# Altium PCB PCB2.PcbDoc (part 2 of 4)
Units mil, origin at the board's own origin, x right, y up, seen from the top; angles counter-clockwise.
Board outline 7874.02 x 7086.61 mil, 2 copper layers (Top Layer, Bottom Layer); 393 components, 284 nets, 1417 pads, 404 vias.
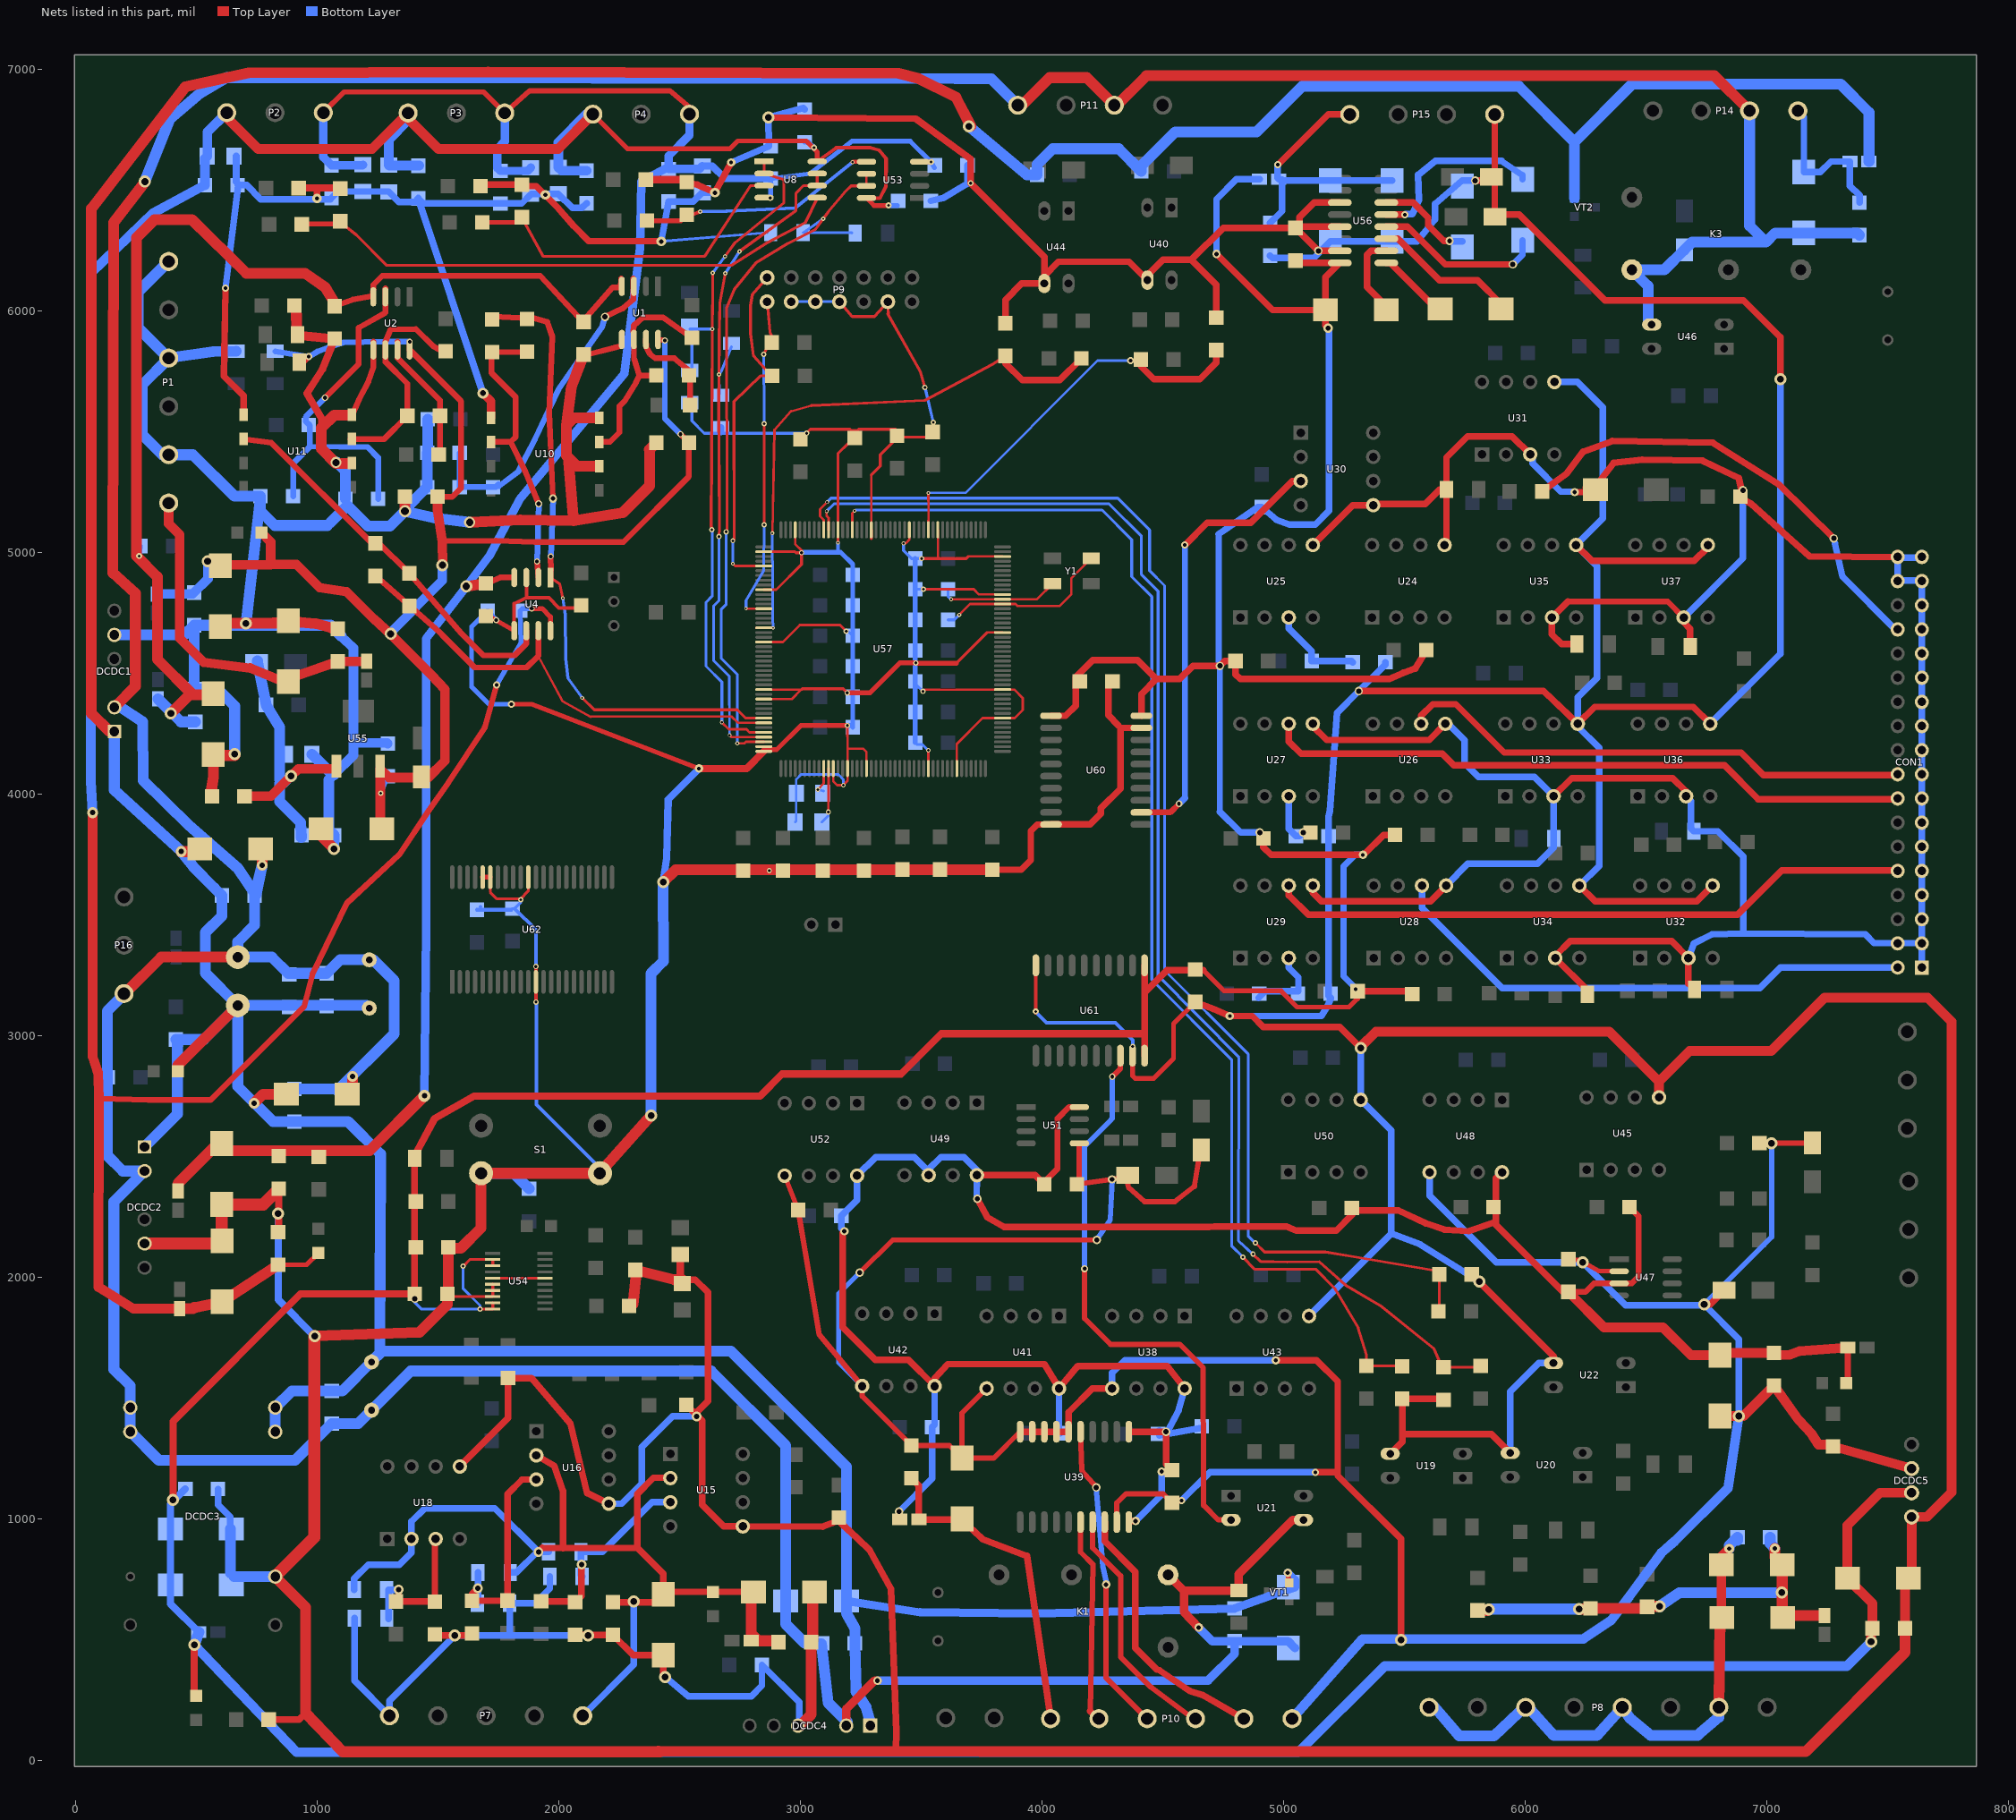
[diagram p2: the nets of this part, all layers, seen from the top]

## Via types
v1: diameter 22, hole 12, Top Layer to Bottom Layer, 63 vias
v2: diameter 19, hole 11, Top Layer to Bottom Layer, 42 vias
v3: diameter 50, hole 28, Top Layer to Bottom Layer, 34 vias
v4: diameter 15, hole 8, Top Layer to Bottom Layer, 27 vias
v5: diameter 35, hole 22, Top Layer to Bottom Layer, 25 vias
v6: diameter 16, hole 8, Top Layer to Bottom Layer, 23 vias
v7: diameter 30, hole 15, Top Layer to Bottom Layer, 22 vias
v8: diameter 22, hole 11, Top Layer to Bottom Layer, 14 vias
v9: diameter 17, hole 8, Top Layer to Bottom Layer, 13 vias
v10: diameter 35, hole 20, Top Layer to Bottom Layer, 12 vias
v11: diameter 16, hole 7, Top Layer to Bottom Layer, 10 vias
v12: diameter 18, hole 8, Top Layer to Bottom Layer, 9 vias
v13: diameter 25, hole 15, Top Layer to Bottom Layer, 8 vias
v14: diameter 40, hole 22, Top Layer to Bottom Layer, 8 vias
v15: diameter 45, hole 22, Top Layer to Bottom Layer, 7 vias
v16: diameter 25, hole 12, Top Layer to Bottom Layer, 6 vias
v17: diameter 15, hole 7, Top Layer to Bottom Layer, 6 vias
v18: diameter 15, hole 9, Top Layer to Bottom Layer, 6 vias
v19: diameter 35, hole 18, Top Layer to Bottom Layer, tented bottom, 6 vias
v20: diameter 27, hole 15, Top Layer to Bottom Layer, 5 vias
v21: diameter 40, hole 18, Top Layer to Bottom Layer, 4 vias
v22: diameter 50, hole 30, Top Layer to Bottom Layer, 4 vias
v23: diameter 14, hole 7, Top Layer to Bottom Layer, 4 vias
v24: diameter 157.48, hole 137.8, Top Layer to Bottom Layer, 4 vias
v25: diameter 35, hole 15, Top Layer to Bottom Layer, 4 vias
v26: diameter 35, hole 18, Top Layer to Bottom Layer, 3 vias
v27: diameter 25, hole 11, Top Layer to Bottom Layer, 3 vias
v28: diameter 17, hole 9, Top Layer to Bottom Layer, 3 vias
v29: diameter 22, hole 15, Top Layer to Bottom Layer, 3 vias
v30: diameter 30, hole 17, Top Layer to Bottom Layer, 2 vias
v31: diameter 20, hole 12, Top Layer to Bottom Layer, 2 vias
v32: diameter 28, hole 15, Top Layer to Bottom Layer, 2 vias
v33: diameter 45, hole 25, Top Layer to Bottom Layer, 2 vias
v34: diameter 40, hole 18, Top Layer to Bottom Layer, tented bottom, 2 vias
v35: diameter 47, hole 30, Top Layer to Bottom Layer, 1 vias
v36: diameter 30, hole 18, Top Layer to Bottom Layer, 1 vias
v37: diameter 27, hole 17, Top Layer to Bottom Layer, 1 vias
v38: diameter 12, hole 7, Top Layer to Bottom Layer, 1 vias
v39: diameter 18, hole 10, Top Layer to Bottom Layer, 1 vias
v40: diameter 45, hole 30, Top Layer to Bottom Layer, 1 vias
v41: diameter 18, hole 11, Top Layer to Bottom Layer, 1 vias
v42: diameter 26, hole 15, Top Layer to Bottom Layer, 1 vias
v43: diameter 18, hole 9, Top Layer to Bottom Layer, 1 vias
v44: diameter 50, hole 32, Top Layer to Bottom Layer, 1 vias
v45: diameter 24, hole 15, Top Layer to Bottom Layer, 1 vias
v46: diameter 50, hole 22, Top Layer to Bottom Layer, 1 vias
v47: diameter 20, hole 10, Top Layer to Bottom Layer, 1 vias
v48: diameter 17, hole 7, Top Layer to Bottom Layer, 1 vias
v49: diameter 34, hole 15, Top Layer to Bottom Layer, 1 vias
v50: diameter 35, hole 17, Top Layer to Bottom Layer, 1 vias

## Nets (pads, with @x,y where several pads share a name; then routed paths per layer and width w, separated by ;. In a path a pad name is that pad's centre, name@x,y a point inside that pad or via, vN(x,y) a via of type N, cw(c..) or ccw(c..) an arc to the next point about the centre after c; other vN are vias at no path point) (continued)
+5V_C: +5V.A C43.2 C95.1 C99.2 C106.2 C111.1 C122.1 C129.2 C142.2 C146.2 C159.1 C163.1 D33.2 DCDC5.2 L4.1 L12.2 R67.1 R68.1 R69.1 R71.1 R74.1 R75.1 R76.1 R123.2 U54.2 U54.3 U54.9 U54.10 U56.16 U60.1 U60.20 U61.1 U61.20 | length 24285.6
  Top Layer w11.81: v1(1604,2046.26) 1631.57,2073.83 U54.2@1726.73,2073.83 U54.3@1726.73,2048.24 ; v1(1673.84,1869.1) U54.10@1726.73,1869.1 U54.9@1726.73,1894.69
  Top Layer w20: 4668,3272 4754,3186 4990,3186 5057,3119 5272,3119 5307,3154 R75.1@5307,3185
  Top Layer w27: 4518,3272 4668,3272
  Top Layer w27.56: D33.2@1403.07,2504.07 D33.2@1403.07,2493.26 1403.07,1932.19 C111.1@1404,1931.26 v5(1404,1911.26) ; U60.1@4037.99,4325 4098,4325 4140,4367 4140,4485 4211,4556 4396,4556 4474,4478 4474,4477 ; U60.20@4412.01,4325 4412.01,4415.01 4474,4477 ; U61.20@4425,2917.99 4425,3179 ; U61.1@4425,3292.01 4425,3179 ; 4518,3272 4425,3179 ; v19(4723,6237) 4955,6005 C122.1@5174.02,6005 ; v5(4902,3842) R71.1@4917,3827 ; R71.1@4917,3817 4917,3782 4949,3750 v25@5317,3750 ; C129.2@5050,6210 5060,6200 U56.16@5233.54,6200 5174.02,6140.47 C122.1@5174.02,6005 ; v14(5185,5930) 5174.02,5940.98 C122.1@5174.02,6005 ; v7(5299,3193) R75.1@5307,3185 5499,3185 ; v25(5329,3749) 5332,3749 5415,3832 R69.1@5462,3832 ; R67.1@5592,4597 5546,4521 5497,4503 5437,4477 4822,4477 4802,4497 R68.1@4802,4552 4757,4552 v5(4737,4532) 4625,4532 4570,4477 4474,4477
  Top Layer w30: v3(403,1078) 403,1404 930.26,1931.26 C111.1@1404,1931.26 ; v3(491,479) 491,276 +5V.A@499,268 ; D33.2@1403.07,2504.07 1486,2658 1649,2750 2834,2751 2925,2842 3417,2842 3584,3009 4417,3009
  Top Layer w40: v3(7433,491) 7433,541 C43.2@7439,547 7439,650.02 C159.1@7335.02,754 7335.02,973.02 7470,1108 DCDC5.2@7601,1108
  Bottom Layer w11.81: v5(1404,1911.26) 1404,1895.26 1430.16,1869.1 v1(1673.84,1869.1) 1673.84,1883.42 1604,1953.26 v1(1604,2046.26)
  Bottom Layer w25: v5@4732,4532 4732,5077 ; 4737,3928 v5(4737,4532)
  Bottom Layer w27.56: v19@4723,6240 4723,6464 4806,6547 L4.1@4901.63,6547 ; 4732,5077 4895,5189 R76.1@4910,5189 4971,5137 5027,5116 5131,5116 5189,5174 5189,5926 v14(5185,5930) ; 4737,3928 4823,3842 v5(4902,3842) ; v7@5299,3197 5249,3247 5249,3701 5297,3749 v25(5329,3749)
  Bottom Layer w30: C99.2@454,1124 392.02,1062.02 C163.1@392.02,959 C95.1@392.02,727 392.02,648.61 L12.2@509.63,531
  Bottom Layer w40: v3(491,479) 915,34 5062,34 5419,391 7333,391 v3(7433,491)
  Bottom Layer w45: v3(491,479) L12.2@509.63,531
+5V_COM: +5V_COM.A C70.2 C75.2 C79.2 C164.1 C165.2 L2.1 L16.2 R92.2 R97.2 R99.2 R102.1 R105.1 R114.2 R117.1 R121.2 U38.8 U39.1 U39.20 U41.8 U42.8 U47.3 U48.8 U49.6 U49.8 U51.8 U52.8 | length 10652.1
  Top Layer w24: C79.2@4010,2385 4010,2395 4065,2450 4065,2658 4112,2705 U51.8@4155,2705 ; C75.2@6180,1940 6251,1940 6286,1975 U47.3@6390,1975 6442,1975 6470,2003 6470,2254 R105.1@6433,2291
  Top Layer w27.56: v10(3182,2191) 3176,2185 3176,1793 3310,1659 3447,1659 U42.8@3556,1550 3556,1582 3610,1641 4011,1641 U41.8@4071,1540 4149,1633 4519,1633 U38.8@4591,1540 ; v10(3409.01,1031.01) 3409.01,1000.62 L2.1@3411.63,998 ; U49.8@3731,2423 3972,2423 C79.2@4010,2385 ; v10(3733,2325) 3773,2250 3844,2209 4692,2209 4714,2211 5011,2211 5054,2193 5218,2193 R117.1@5285,2260 ; U39.20@4360,986.99 4364.01,991 v26(4388,991) ; U39.1@4360,1383 U39.1@4360,1361.01 v5(4513.99,1361.01) 4513.99,1227.01 C70.2@4539,1202 4533,1196 v26(4496,1196) ; R117.1@5285,2276 5297,2277 5476,2277 5589,2224 5666,2198 5766,2191 5880,2230 ; 5880,2228 5880,2230 ; U48.8@5905,2435 5880,2410 5880,2230 ; C75.2@6180,1940 6158,1940 5880,2218 5880,2230 ; C164.1@6807,1677.98 C164.1@6816.02,1687 ; C165.2@7031,1687 C165.2@7039,1679 ; +5V_COM.A@7331,1563 7336.63,1568.63 L16.2@7336.63,1709
  Top Layer w40: C75.2@6180,1940 6327,1793 6572,1793 6687.02,1677.98 C164.1@6807,1677.98 ; C164.1@6816.02,1687 C165.2@7031,1687 ; C165.2@7039,1679 7094,1679 7136,1695 L16.2@7336.63,1709
  Bottom Layer w27.56: v10(3182,2191) 3170,2203 R121.2@3170,2255 3235,2320 U52.8@3235,2421 3312,2498 3471,2498 3531,2438 U49.6@3531,2423 3531,2447 3582,2498 3677,2498 3731,2444 U49.8@3731,2423 v10@3730,2324 ; v10@3409.5,1031.5 3546,1168 R99.2@3546,1380 3556,1390 U42.8@3556,1550 ; U41.8@4071,1540 4071,1360 R97.2@4076,1355 ; v26@4388,992 4496,1100 v26(4496,1196) ; R92.2@4486,1366 4486,1345 4515.91,1350.44 R102.1@4662,1377 ; v5(4513.99,1361.01) 4520.01,1361.01 4566,1449 U38.8@4591,1540
+10V: C113.1 C115.2 L14.2 P1.1 | length 1401.2
  Top Layer w39.37: P1.1@385,5206 385,5120 430,5075 430,4646 530,4546 722,4523 853,4470 C115.2@1085,4550 L14.2@1186,4550
+12V_P: +12V_P.A C118.1 C120.2 C160.1 C161.2 D7.2 D9.2 D12.2 L15.2 P7.1 U15.2 U16.2 U18.2 | length 4210.6
  Top Layer w27.56: U16.2@1907,1263 1981,1219.52 2017,1116 2017,1011 2017,878 ; v14@1915,863 1932,880 2017,878 ; C161.2@2224,655 2399.02,655 C160.1@2432,687.98 ; U15.2@2453,1171 2391,1169 2325,1103 2325,880 ; C118.1@2806.02,698 2797,698 +12V_P.A@2638,698 2442.02,698 C160.1@2432,687.98 ; 2017,878 2325,880 ; 2325,880 2432,773 C160.1@2432,687.98
  Top Layer w45: C118.1@2802,705 2797,700 2797,698 2797,525 2827,495 2905,495 C120.2@2910,490
  Bottom Layer w27.56: D12.2@1153.07,707 1153.07,752.07 1211,810 1340,810 1390,860 U18.2@1390,917 1390,989 1445,1044 1735,1044 v14@1915,864 ; D9.2@1798.93,778 1825,778 1911,864 v14@1915,864 ; v14(1916,863) v14@1915,864 ; D7.2@1958.07,864 v14@1915,864 ; P7.1@2099,185 2311,397 v3(2311,659)
+15V_A: +15V_A.A C2.1 C15.1 C80.2 C82.1 C112.1 C114.2 D1.2 D3.2 D34.2 L7.2 U1.8 U2.8 U55.3 | length 6440.5
  Top Layer w24: D3.2@925.93,5789 942,5789 v7(965,5812) ; v45(1383,5874) 1383,5875 1383,5840 1596,5627 1596,5269 1559,5232 C15.1@1498,5232 ; 1517.15,5048 1740,5050 1900,5045 2268,5045 2539,5316 C2.1@2539,5456 v13(2504,5491) ; U1.8@2411,5883 v13(2439,5879)
  Top Layer w39.37: v3(546,4965) 579.98,4965 C82.1@599,4945.98 603,4949.98 807,4949.98 807,4952 ; +15V_A.A@769,5083 807,5045 807,4952 ; C112.1@1261,3865 1260.74,4005 1260.55,4105.83 1297.09,4069.29 1459.29,4069.29 1529,4139 1529,4433 1472,4495 1305,4662 1234,4726 1121,4839 1010,4856 914,4952 807,4952 ; v22(1304,4664) v22@1304,4671 ; C15.1@1498,5232 1498,5181 1517.15,5048 1520,4951 v22(1518,4949)
  Bottom Layer w20: v8(1262,4005) C114.2@1292,4075
  Bottom Layer w24: D1.2@826,5833.93 v7(965,5812) 1001,5833 1049,5851 1109,5870 1279,5875 v45(1383,5874) ; v13(2439,5879) 2439,5556 v13(2504,5491)
  Bottom Layer w39.37: L7.2@339,4829.37 484.37,4829.37 C80.2@490,4835 548,4893 v3@548,4964 ; v22(1304,4664) 1304,4671 1518,4885 v22(1518,4949)
+15V_C: +15V_C.A C3.1 C4.1 C6.2 C11.1 C12.2 C17.1 C18.2 C29.2 C41.2 C88.2 C90.1 L10.2 P2.1 P3.1 P4.1 U4.8 U8.8 U53.8 | length 13634.1
  Top Layer w15: U8.8@3070,6620 3149,6677 3289,6678 3326,6667 3355,6632 3354,6516 3329,6468 U53.8@3274,6469
  Top Layer w20: C88.2@838,2052 956,2052 +15V_C.A@1005,2101 ; v13(1888,4769) 1931,4769 1965.36,4734.64 U4.8@1965.36,4677.36 ; P4.1@2141,6816 2284,6673 2709,6673 2741,6705 3024,6705 3070,6659 U8.8@3070,6620 ; U53.8@3274,6469 3305,6438 v16(3365,6438)
  Top Layer w24: 96,2740 300,2734 558,2734 946,3122 981,3258 1122,3549 1340,3750 1460,3930 1541,4046 ; 1544,4050 1693,4276 ; 1694,4279 v7(1743,4453)
  Top Layer w40: v15(70,3924) 70,2914 93,2845 96,2740 94,1960 238.37,1870.63 L10.2@430,1870.63 ; P2.1@625.18,6822.18 625.18,6801.82 755,6672 1227,6672 P3.1@1376,6821 1376,6798 1502,6672 1997,6672 P4.1@2141,6816
  Top Layer w45: L10.2@430,1870.63 485.63,1870.63 490,1875 C90.1@606,1899.02 C88.2@838,2052
  Bottom Layer w20: v7(1743,4453) 1843,4626 C3.1@1840,4760 1849,4769 v13(1888,4769) ; C29.2@3018,6700 3034,6700 v16(3057,6677) ; v16(3365,6438) C41.2@3402,6438
  Bottom Layer w24: 63,4797 63,4808
  Bottom Layer w40: 62,4053 v15(70,3924) ; 63,4057 63,4797 ; 63,4808 63,6159 323,6408 C6.2@535,6522 535,6632.12 C4.1@544.88,6642 544.88,6741.88 P2.1@625.18,6822.18 ; P3.1@1376,6821 1376,6791 1296,6711 C11.1@1296,6605.12 1298.12,6603 C12.2@1422,6603 ; C18.2@2115,6582 2012.12,6582 C17.1@1998,6596.12 1998,6699 2115,6816 P4.1@2141,6816
+24V: 24V_IN.A C60.1 C61.2 C81.1 C83.2 C84.1 C85.2 C89.1 C91.2 C94.1 C98.2 C117.1 C119.2 C157.1 C158.1 DCDC1.1 DCDC2.1 DCDC3.22 DCDC3.23 DCDC4.1 F1.2 L3.1 R93.2 R100.2 VT1.3 VT2.3 | length 22050.7
  Top Layer w20: v19(5018,777) VT1.3@5024,735.5
  Top Layer w45: DCDC1.1@160,4260 140,4260 65,4335 65,6425 453,6929 715,6987 1708,6990 3407,6985 3487,6964 3644,6886 v3@3706,6766 ; 24V_IN.A@422,2854 422,2877 C84.1@671,3126 ; v15(437,3763) 503.02,3763 C81.1@514.02,3774 ; v15(738,2721) 775,2758 C89.1@872.02,2758
  Bottom Layer w35: C117.1@3190.98,660 3496,613 3983,609 C61.2@4798,629 4938,680 5048,716.98 5048,747 v19(5018,777)
  Bottom Layer w45: DCDC1.1@160,4260 160,4018 v15(437,3763) ; DCDC2.1@285,2540 421,2676 421,2979 F1.2@415,2985 530,2985 C84.1@671,3126 ; v15@437,3761 485,3702 575,3611 C83.2@605,3581 605,3496 537,3428 537,3260 C84.1@671,3126 ; 669.5,2792.5 817,2645 C91.2@905,2645 1128,2645 1262,2511 1259,1695 1268,1695 ; 671,2791 C84.1@671,3126 ; DCDC3.22@826,1361 DCDC3.23@826,1461 895,1530 C98.2@1060,1530 1104,1530 C94.1@1225,1651 ; C157.1@1215,3115 1204,3126 C84.1@671,3126 ; C94.1@1225,1650 C94.1@1225,1651 ; DCDC4.1@3295,140 3272,221 3231,285 3226,481 3226,546 3190.98,609.02 C117.1@3190.98,660 3190.98,1216.02 2712,1695 1268,1695 ; v3(3698,6765) 3937,6565 R100.2@3980,6565 3980,6608 4045,6673 4318,6673 R93.2@4412,6579 4412,6602 4552,6742 4889,6742 5079,6932 5974,6932 6205,6701 ; VT2.3@6205,6467.5 6205,6701 ; L3.1@7424.37,6620 7424.37,6822.63 7307,6940 6444,6940 6205,6701 ; C94.1@1225,1651 1225,1652 1268,1695
+24V_F: C57.2 C58.1 C162.1 L1.2 R55.1 R58.1 R63.1 | length 1831.1
  Top Layer w45: R55.1@5804,621 5846,621 v3(5850,625) ; v3(6224,627) 6269,627 R58.1@6272,630 6500,630 R63.1@6506,636 6508,638 v3(6558,638) ; v34(7035,878) 7035,840.98 C58.1@7064.98,811 7064.98,594 C162.1@7066.98,592 ; C162.1@7048,573.02 C162.1@7066.98,592 ; L1.2@7240,600.37 7075.35,600.37 C162.1@7066.98,592
  Bottom Layer w45: v3@5860,627 v3(6224,627) ; v3(6558,638) 6639,695 v3(7064,695) ; C57.2@7015,924 7015,898 v34(7035,878)
-15V_A: C9.1 C21.1 C86.1 C87.2 L9.2 R136.1 U1.4 U2.4 | length 4889.9
  Top Layer w24: C21.1@1072,6021 1147,6048 1231,6064 1232,6110 1269,6147 1923,6146 C9.1@2104,5952 ; C9.1@2106,5965 2223,6099 2256,6099 U1.4@2259,6135
  Top Layer w45: v3(394,4335) 470.98,4411.98 485.02,4411.98 ; C87.2@587,4411.98 485.02,4411.98 ; C21.1@1072,6021 1074,6029 1032,6100 950,6157 706,6158 481,6379 326,6379 252,6305 252,4986 338,4900 338,4559 485.02,4411.98
  Bottom Layer w20: v27(263,4987) R136.1@268,5028
  Bottom Layer w45: L9.2@340,4395.63 435.63,4300 C86.1@495,4300
-15V_C: C10.1 C31.2 C34.1 C37.2 C42.2 C92.1 C93.2 C96.2 C97.2 C100.1 C101.1 L11.2 P2.3 P3.3 P4.3 R135.1 U4.4 U8.4 U53.4 | length 9648
  Top Layer w20: U53.4@3494,6619 3495,6618 v16(3541,6618)
  Top Layer w22: P2.3@1025.18,6822.18 1111,6908 1689,6908 P3.3@1776,6821 1880,6913 2459,6913 2541,6845 P4.3@2541,6816 ; U8.4@2850,6470 2874,6470 v16(2875,6469)
  Top Layer w24: C10.1@1702,4873 1757.36,4897.36 U4.4@1815.36,4897.36
  Top Layer w45: 423.81,2389.19 C93.2@603.32,2568.69 ; C93.2@605,2525 1217,2525 v46(1444,2752) ; v22(1617,4861) C10.1@1695,4874
  Bottom Layer w20: C37.2@2877,6549 3041,6570 3214,6704 3455,6704 v16(3541,6618) C42.2@3555,6594
  Bottom Layer w22: v16(2875,6469) 2877,6471 C37.2@2877,6549
  Bottom Layer w30: C31.2@2594,6601.12 2635.88,6601.12 2688,6549 C37.2@2877,6549
  Bottom Layer w35: P2.3@1025.18,6822.18 1025.18,6637.82 C100.1@1059,6604 1186.88,6604 C96.2@1189,6606.12 ; v46(1444,2752) 1451,3437 1451,4645 v22(1617,4861) 1714,4989 1838,5221 2272,5742 2336,6259 2342,6537 2449,6595 C34.1@2455,6589 ; P3.3@1776,6821 1776,6703 1746,6673 1746,6593 C101.1@1758,6581 1870.88,6581 C97.2@1884,6594.12 ; P4.3@2541,6816 2541,6729 2455,6643 C34.1@2455,6589 ; C31.2@2594,6601.12 2581.88,6589 C34.1@2455,6589
AI0: C5.2 R1.2 U4.1 U57.169 | length 2619.6
  Top Layer w11: 2739,4350 2773.43,4315.57 U57.169@2848.91,4315.57
  Top Layer w11.81: U4.1@1965.36,4897.36 2004,4871 v6(2016.42,4812) ; v11(2097,4399) 2147,4350 2739,4350
  Top Layer w24: R1.2@1727,5978 C5.2@1876,5970 ; C5.2@1866,5980 1952,5956 1973,5894 1960,5579 v26(1976,5225) ; U4.1@1965.36,4897.36 U4.1@1965.36,4920.36 ; v13(1966,4985) U4.1@1968,4928
  Bottom Layer w11.81: v6(2016.42,4812) 2027,4744 2029,4561 2038,4480 v11(2097,4399)
  Bottom Layer w24: v13@1967,4986 v26(1976,5225)
AI1: C16.2 R11.2 U4.7 U57.170 | length 2044.9
  Top Layer w10: 1913,4576 2016,4385 2133,4321 2716,4322 2742.12,4295.88 U57.170@2848.91,4295.88
  Top Layer w24: R11.2@1241,4904 1506,4672 1526,4651 1652,4525 1729,4525 ; 1708,4525 1729,4525 ; U4.7@1915.36,4677.36 1915.36,4573.36 1867,4525 1729,4525
BRAKE: U30.3 U60.12 | length 1841.6
  Top Layer w24: U60.12@4412.01,3925 4532,3925 v20(4568,3961)
  Top Layer w27.56: v7(4592,5032) 4684,5124 4864,5124 5037,5297 U30.3@5072,5297
  Bottom Layer w25: 4592,3985 v7(4592,5032)
  Bottom Layer w27.56: v20(4568,3961) 4592,3985
BRAKE_OC: CON1.30 R77.2 | length 1884.4
  Top Layer w27.56: R77.2@6071,5254 6174,5329 6240,5418 6362,5463 6778,5455 7053,5282 v5(7279,5060)
  Bottom Layer w27.56: 7283,5040 7314.5,4901.5 CON1.30@7538.2,4677.8
CONTACT_AUX: C71.2 R95.1 U57.101 | length 1705.5
  Top Layer w10: U57.101@3530.01,5095.09 3531,5177 v17(3530,5248) ; v7(4367,5796) 4406,5796 R95.1@4410,5800
  Top Layer w27.56: R95.1@4410,5800 4410,5772 4464,5718 4653,5718 4722,5787 C71.2@4722,5839
  Bottom Layer w10: v17(3530,5248) 3683,5248 4231,5796 v7(4367,5796) v7@4368,5796
CURRENT_SEN_A: D40.1 D41.2 U53.6 U53.7 U57.174 | length 3124.7
  Top Layer w10: v28(2739,4211) 2768,4211 2774.14,4217.14 U57.174@2848.91,4217.14 ; U53.7@3274,6519 U53.6@3274,6569
  Top Layer w11.81: v1(2693,5087) 2693,5091 2697,5095 2695,6014 2726,6090 2817,6201 2949,6281 3062,6339 3094.58,6383.31 3115,6411.09 3187,6496 3210,6519 U53.7@3274,6519
  Bottom Layer w11.81: v1(2693,5087) 2693,4787 2673,4767 2673,4562 2739,4496 v28@2739,4212 ; D41.2@3024.71,6325 D41.2@3010.93,6325 ; v12(3095,6383) D41.2@3010.93,6325 ; D40.1@3213.29,6324 3212.29,6325 D41.2@3010.93,6325
CURRENT_SEN_B: D38.1 D39.2 U8.6 U8.7 U57.173 | length 3005.4
  Top Layer w10: v18(2707,4245) 2715.17,4236.83 U57.173@2848.91,4236.83
  Top Layer w11.81: v1(2663,5067) 2665,5101 2662,5629 2662.83,5738 2664,5892 2667,6035 v12(2689,6157) ; v12@2745,6246 2747.45,6247.76 2982,6416 2982,6489 3013,6520 U8.6@3070,6520 U8.7@3070,6570
  Bottom Layer w10: 2706,4488 v18(2707,4245)
  Bottom Layer w11.81: v1(2663,5067) 2663,4802 2641,4780 2641,4553 2706,4488 ; v12(2689,6157) v12(2748,6247) ; D38.1@2715,5853.29 2672,5750 v12(2663,5738) ; v12(2663,5738) 2664,5658 v12(2663,5738)
CURRENT_SEN_C: D36.1 D37.2 U8.1 U8.2 U57.172 | length 2998.9
  Top Layer w10: v18(2675,4298) 2704,4269 2777,4269 2789.49,4256.51 U57.172@2848.91,4256.51
  Top Layer w11.81: v1(2634,5095) 2634,5104 2631,5107 v12(2637,6159) ; v12(2688,6227) 2730,6284 2932,6448 2932,6545 U8.2@2850,6570 U8.1@2850,6620
  Bottom Layer w11.81: D37.2@2551,5765.71 2551,5919.29 2542.29,5926 v12(2635,5926) v12@2636,5927 ; v1(2634,5095) 2635,5094 2635,4820 2609.5,4794.5 2609.5,4530.5 2675,4465 v18(2675,4298) ; v12(2637,6159) v12(2688,6227)
D\I\S\P\L\A\Y\_\C\S\: P10.5 U39.16 | length 851.8
  Top Layer w22: U39.16@4160,986.99 4160,863 4211,812 4200,203.64
  Top Layer w27.56: 4200,203.64 P10.5@4236,173
D\S\P\_\O\V\E\R\_\T\: C72.2 R103.1 U57.150 | length 2310.7
  Top Layer w10: U57.150@2818,4689 U57.150@2848.91,4689.58 v23(2887,4689) ; v6(2884,5081) 2893,5509 2962,5586 3046,5609.63
  Top Layer w11.81: 3046,5609.63 3515,5631 3797,5781 C72.2@3849,5815
  Top Layer w27.56: 3850,5784 3919,5715 4074,5715 R103.1@4164,5805
  Bottom Layer w11.81: v6(2884,5081) 2885,4854 2885,4731 v23(2887,4689)
DGND: C60.2 C61.1 C73.2 C74.1 C81.2 C83.1 C84.2 C85.1 C89.2 C91.1 C94.2 C98.1 C117.2 C119.1 C157.2 C158.2 D17.1 D31.1 DCDC1.2 DCDC2.2 DCDC3.2 DCDC3.3 DCDC4.2 K1.1 K3.1 P11.1 P11.3 P14.3 P16.1 R134.1 U21.3 U46.3 | length 24556.8
  Top Layer w35: DCDC4.2@3190,144 3190,213 3308,331 v10(3319,331) ; K1.1@4522.64,768.39 4588.09,702.93 ; v19(4649,550) 4588.09,614.91 4588.09,702.93 ; U21.3@5083,996 5039,996 4815,772 D17.1@4815,702.93 4588.09,702.93
  Top Layer w45: DCDC1.2@165,4365 247,4447 247,4832 153,4917 157,6367 282,6529 v22(286,6537) ; P16.1@209,3181 354,3326 C84.2@671,3326 ; v15(772,3706) C81.2@772,3767.98 ; C89.2@1123.98,2758 1146,2780.02 v15(1146,2832) ; P11.1@3911,6846 4032,6967 4186,6967 4305.5,6847.5 4433,6975 6785,6975 P14.3@6930,6830
  Bottom Layer w35: v10(3319,331) 4688,331 4798,441 C61.1@4798,494 ; v19(4649,550) 4705,494 C61.1@4798,494 ; C60.2@5048,465.02 5019.02,494 C61.1@4798,494
  Bottom Layer w45: DCDC1.2@160,4360 186,4360 277,4300 279,4057 467,3873 673,3692 746,3582 v15(772,3706) C83.1@740,3581 740,3458 671,3389 C84.2@671,3326 812,3326 879,3259 C85.1@1039,3259 1095,3315 C157.2@1215,3315 1231,3315 1318,3228 1318,3008 1082.5,2772.5 ; P16.1@209,3181 131,3103 131,2504 195,2440 DCDC2.2@285,2440 158,2313 158,1619 226,1551 DCDC3.2@226,1461 DCDC3.3@226,1361 344,1243 908,1243 C98.1@1060,1395 1170,1395 1387,1612 2631,1612 2939.02,1303.98 C117.2@2939.02,660 2939.02,564.98 3019,485 3087,483 3115,239 3195,159 DCDC4.2@3195,140 ; v22(286,6537) 390,6796 515,6902 625,6967 3642,6962 3791,6962 P11.1@3900,6853 ; C91.1@905,2780 1090,2780 ; U46.3@6525,5945 6510,5960 6510,6103.98 K3.1@6442.36,6171.61 6577.32,6171.61 D31.1@6660,6254.29 6691.71,6286 6998,6286 ; P14.3@6930,6830 6930,6354 6998,6286 ; C74.1@7385,6315 7375.98,6324.02 C73.2@7155,6324.02 7036.02,6324.02 6998,6286
DISPLAY_CLK: P10.2 U39.18 | length 1115.8
  Top Layer w27.56: U39.18@4260,986.99 4260,908 4387,781 4387,465 4475,377 4486,374 4613.39,287 4665,271 P10.2@4836,173
DISPLAY_IN: P10.4 U39.5 | length 1275.7
  Top Layer w22: U39.5@4160,1361.01 4165,1200 v5@4225,1131 ; v19(4266,728) 4265,343 P10.4@4435,173
  Top Layer w27.56: v5(4225,1130) v5@4225,1131 ; P10.4@4435,173 P10.4@4436,173
  Bottom Layer w22: v5(4225,1130) 4252,803 v19@4267,737
DISPLAY_OUT: P10.3 U39.17 | length 1009.4
  Top Layer w22: U39.17@4210,986.99 4210,880 4326,764 4326,428 4450,304 ; 4452,303 P10.3@4627,173
  Top Layer w27.56: P10.3@4627,173 P10.3@4636,173
DO0: U21.2 U61.18 | length 2424.9
  Top Layer w22: v30(4177,2036) 4177,1830 4284,1723 4571,1723 4668,1626 4668,1505 4670,1298 4670,1149 4670,1056 4730,996 U21.2@4783,996 ; v42(4292,2831) 4325,2864 U61.18@4325,2917.99
  Bottom Layer w22: v30(4177,2036) 4177,2543 4286.5,2652.5 ; 4292,2658 v42(4292,2831)
EMU0: P9.13 R128.2 U57.137 | length 1467.2
  Top Layer w10: v17(2721,4955) 2730.51,4945.49 U57.137@2848.91,4945.49
  Top Layer w11.81: v2(2721,5050) 2726,5055 2725,5626 2837,5733 R128.2@2878.12,5733 ; 2800,6067 P9.13@2862,6139.67 ; 2801,6068 2794,6024 2794,5908 2806,5815 R128.2@2878.12,5733 ; R128.2@2879,5732 R128.2@2878.12,5733 ; R128.2@2884,5733 R128.2@2878.12,5733
  Bottom Layer w11.81: v17(2721,4955) v2(2721,5050)
EMU1: P9.14 R129.2 U57.146 | length 1389.1
  Top Layer w10: v23(2775,4769) U57.146@2848.91,4768.32
  Top Layer w11.81: v1(2848,5822) 2883,5892 2874,5913 P9.14@2862,6053 ; v1(2850,5116) v1(2850,5534)
  Bottom Layer w11.81: v23(2775,4769) 2775,4803 2848.91,4925.8 v1(2850,5116) ; v1(2848,5822) 2850,5567 v1(2850,5534)
GND_A: C2.2 C8.1 C9.2 C15.2 C19.1 C21.2 C80.1 C82.2 C86.2 C87.1 C112.2 C113.2 C114.1 C115.1 C116.2 D2.1 D4.1 DCDC1.5 P1.2 P1.4 P1.6 R7.1 R8.1 R16.1 R17.1 R126.1 R127.1 U1.5 U2.5 U10.2 U10.4 U11.2 U11.4 | length 11186.1
  Top Layer w24: C21.2@1072,5886 C21.2@1083,5875 ; U11.4@1148,5577 1173,5636 1211,5707 1233,5771 U2.5@1233,5875 ; C9.2@2101,5816 2235,5850 U1.5@2260,5857
  Top Layer w30: 1020,5508 1019,5556 957,5660 1021,5759 C21.2@1072,5886
  Top Layer w39: D4.1@917,5900 918.64,5899.85 C21.2@1072,5886
  Top Layer w45: R126.1@558,3992 570,4072 C87.1@570,4161.02 ; C87.1@570,4165.02 C87.1@570,4161.02 ; C82.2@605,4708.02 812,4708.02 ; v3@658,4161.02 C87.1@570,4161.02 ; 817.98,4709 892,4709 929,4712 994,4707 1060,4688.98 C115.1@1085,4685 ; R16.1@905,6023 912,6021 D4.1@917,5900 ; C112.2@1015.02,3857 1015.02,3828.98 v3(1070,3774) ; U11.2@1138.47,5370 1078,5370 1017,5431 1017,5517 1070,5570 U11.4@1138.47,5570 ; v44(1363,5172) C15.2@1363,5232 ; v35(1631,5126) 1841,5136 2061,5132 ; 2039,5396 2061,5132 ; C9.2@2101,5816 2052,5685 2032,5528 ; U10.4@2154,5559 2063,5559 2032,5528 ; U10.2@2156,5359 2075,5359 2032,5402 2032,5528 ; C2.2@2375,5427 C2.2@2404,5456 ; C2.2@2376,5429 2376,5277 2265,5166 2061,5132
  Bottom Layer w39.37: 1048,4060 1069,4081 1150,4162 1150,4213 ; 1099,4654 1150,4605 1150,4213 ; C114.1@1292,4210 1289,4213 1150,4213
  Bottom Layer w45: DCDC1.5@160,4660 450,4660 C80.1@490,4700 ; P1.6@383,6205 259,6081 259,5931 385,5805 275,5695 275,5490 359,5406 P1.2@385,5406 485,5406 657,5234 R17.1@765,5234 765,5172 824,5113 1042,5113 ; P1.4@385,5806 568,5833 D2.1@665,5833.93 ; v3(658,4167) 658,4366 589,4435 C86.2@495,4435 490,4440 C80.1@490,4700 ; v3(705,4708) R17.1@765,5228 ; v3@710,4703 v3@707,4700 ; C116.2@978.12,4166 1063.12,4081 1069,4081 ; 1048,4060 1048,3852 R127.1@1070,3830 v3@1067.64,3774.1 ; 1055,5126 1124.5,5195.5 1210,5110 1301,5110 v44(1363,5172) ; v40(1077,5374) 1081,5374 1117,5338 C19.1@1117,5223 ; 1099,4654 1055,4700 v3@707,4700 ; R7.1@1457,5553 1457,5416 R8.1@1455,5414 C8.1@1455,5272 1363,5180 v44(1363,5172) ; v35(1631,5126) 1488,5144 v44(1363,5172) ; C80.1@490,4700 v3@707,4700
GND_C: C3.2 C4.2 C6.1 C7.1 C10.2 C11.2 C12.1 C13.1 C17.2 C18.1 C20.1 C29.1 C31.1 C34.2 C37.1 C41.1 C42.1 C43.1 C49.1 C51.1 C54.1 C56.1 C59.1 C62.1 C63.1 C64.1 C65.1 C71.1 C72.1 C76.2 C77.2 C78.1 C88.1 C90.2 C92.2 C93.1 C95.2 C96.1 C97.1 C99.1 C100.2 C101.2 C106.1 C107.2 C108.1 C109.2 C110.2 C111.2 C124.1 C125.2 C126.2 C127.2 C128.2 C129.1 C130.2 C134.2 C135.2 C136.2 C137.2 C138.2 C139.2 C140.2 C141.2 C142.1 C143.1 C144.2 C145.1 C146.1 C147.1 C148.2 C149.2 C150.2 C151.2 C152.2 C153.1 C154.1 C155.1 C156.1 C159.2 C163.2 D37.1 D39.1 D41.1 DCDC2.5 DCDC3.16 DCDC5.1 P9.4 P9.8 P9.10 P9.12 P15.4 R5.1 R10.1 R18.1 R130.1 R132.1 R133.1 R137.1 R139.1 S1.1 TVS4.2 TVS5.2 U4.3 U4.5 U10.5 U11.5 U15.5 U16.5 U18.5 U19.3 U20.3 U22.3 U31.5 U32.5 U33.5 U34.5 U35.5 U36.5 U37.5 U40.3 U43.5 U44.3 U45.5 U50.5 U54.6 U54.7 U54.8 U56.11 U56.13 U56.15 U57.12 U57.15 U57.19 U57.32 U57.38 U57.52 U57.58 U57.70 U57.78 U57.86 U57.99 U57.105 U57.113 U57.120 U57.129 U57.134 U57.142 U57.153 U57.163 U57.165 U57.175 U57.176 U60.10 U60.19 U61.10 U61.19 U62.12 U62.34 U62.39 U62.40 | length 70843.7
  Top Layer w10: C90.2@595.02,2140 C90.2@604,2148.98 ; C88.1@838,2187 C88.1@841,2190 ; C109.2@2503,1990.84 2503,1983.12 C109.2@2511,1975.12 ; U57.165@2848.91,4394.31 2965.31,4394.31 3004.68,4433.68 U57.163@2848.91,4433.68 ; U57.153@2848.91,4630.53 2927.53,4630.53 2998,4701 ; U57.142@2848.91,4847.06 2900.06,4847.06 3005,4952 ; U57.134@2848.91,5004.54 2977.46,5004.54 ; U57.129@2978.83,5095.09 2978.83,5036.17 v1@3005,5010 ; U57.12@3136.31,4106.91 3136.31,4054.69 3153,4038 v2(3178,4038) 3195.36,4055.36 U57.15@3195.36,4106.91 3195.2,4189 ; U57.120@3155.99,5095.09 3155.99,5410.99 ; 3182,4285 v1(3195,4285) 3195.2,4189 ; U57.19@3274.1,4106.91 3274,4172 3274,4175 3260,4189 3195.2,4189 ; U57.113@3293.79,5095.09 3293.79,5321.79 ; 3437,5040 3451.27,5054.27 U57.105@3451.27,5095.09 ; v1(3508,4426) 3515.68,4433.68 U57.58@3837.09,4433.68 3885.32,4433.68 3921,4398 3921,4349 3887.57,4315.57 U57.52@3837.09,4315.57 3754.57,4315.57 3648.12,4209.12 U57.38@3648.12,4106.91 ; U57.32@3530.01,4106.91 v2(3530.01,4181.99) ; 3569.38,4978 U57.99@3569.38,5095.09 ; 3695.86,4984.86 U57.86@3837.09,4984.86 ; 3718,4849 3739.62,4827.38 U57.78@3837.09,4827.38 ; 3772.9,4669.9 U57.70@3837.09,4669.9
  Top Layer w11.81: C111.2@1539,1920.28 U54.8@1726.73,1920.28 U54.7@1726.73,1945.87 U54.6@1726.73,1971.46 ; R10.1@1676,6518 1841,6518 C13.1@1847,6524 ; U62.39@1716.2,3656.76 1716.2,3594.8 1744,3567 1841,3567 1873.68,3599.68 U62.34@1873.68,3656.76 ; U4.5@1815.36,4677.36 U4.5@1815.36,4715.36 ; U62.12@1905,3223.87 U62.12@1905.17,3223.69 ; C20.1@2520,6545 C20.1@2530,6535 ; 2977.46,5004.54 2982,5000 v1(3005,5000) ; 2998,4701 3164,4701 v1(3190,4675) ; C128.2@3000,5470 3041,5511 3206,5511 3210,5507 3238,5507 3242,5511 3394,5511 3400,5505 3400,5475 3331,5406 3331,5359 3293.79,5321.79 ; 3004.68,4433.68 3008,4437 3177,4437 v1(3194,4420) ; 3005,4952 v1(3005,5000) ; v1@3005,5010 v1(3005,5000) ; v4(3156,5042) U57.120@3155.99,5095.09 ; 3155.99,5410.99 C126.2@3197,5452 ; P9.8@3162,6030 P9.8@3162,6039.67 3214.67,5978 3307.33,5978 P9.4@3362,6039.67 3364,5988 ; 3293.79,5058.79 U57.113@3293.79,5095.09 ; 3362,5990 3497,5750 v1(3516,5685) ; C127.2@3400,5479 3522,5479 C125.2@3548,5500 ; v1(3478,4544) v1@3479,4543 ; v1(3502,4976) 3687,4976 3695.86,4984.86 ; v1(3510,4849) 3718,4849 ; C125.2@3550,5480 v1(3550,5540) ; 3646,4543 3772.9,4669.9
  Top Layer w15: U4.5@1815.36,4715.36 1814.36,4741.36 1814.36,4789.36 1866,4814 ; U4.3@1865.36,4897.36 1866,4896.73 1866,4814 ; U62.12@1905,3223.87 v1(1905,3287) ; v1(1905.17,3140.17) U62.12@1905.17,3223.69 ; R132.1@2102,4771 2000,4771 1959,4814 1866,4814 ; v16@3975,3095 U61.10@3975,3292.01 ; U61.19@4375,2917.99 U61.19@4375,2956
  Top Layer w20: U62.40@1684.7,3656.76 U62.39@1716.2,3656.76 ; C10.2@1695,4747 1701.15,4743.44 1740.73,4720.54 U4.5@1815.36,4677.36 ; v7@1801,4373 v7(1803,4373) 1888,4373 v25(2580.5,4106.5) ; 2857.22,4186.08 2858.3,4185 2902,4185 3002,4285 v1(3195,4285) ; v1(3194,4420) 3288,4420 3412,4544 v1(3478,4544) ; v1@3479,4543 3646,4543 ; U61.19@4375,2917.99 4375,2835 4386,2824 4463,2824 4545,2906 4545,3050 C146.1@4635,3140
  Top Layer w27: C148.2@3795,3688 3915.5,3688 ; 3915.5,3688.5 3954,3727 3954,3848 3981,3875 U60.10@4037.99,3875
  Top Layer w27.56: v7@620,6094 614,5731 694.59,5650.41 U11.5@694.59,5571 ; R139.1@799,169 925,169 952,196 ; 998,6510 999,6509 v21(999,6466.88) ; U18.5@1590,1217 1790,1417 C54.1@1790,1583 1887,1583 2048,1395 2117,1107 U16.5@2207,1063 ; R10.1@1676,6518 1682,6524 C13.1@1847,6524 ; C13.1@1841,6518 1906,6518 1993,6431 2063,6352 2123.12,6291.88 v21(2424,6289) ; 2412,38 2419,36 ; C109.2@2503,1990.84 2564.73,1990.84 2618,1937.56 2618,1488 2570,1440 v14@2570,1430 ; C51.1@2528,1472 v14@2570,1430 ; C20.1@2530,6535 2573,6524 v21(2646,6490.88) v49(2714,6616) ; v14(2570,1424) v14@2570,1430 ; v3(2868,6803) 3478,6797 3705,6630 v16(3705,6530) 4010,6225 U44.3@4010,6147 ; C49.1@3151,998 3238,918 3286,871 3375,710 3397,118 3395,43 ; C49.1@3158,992 3093,968 U15.5@2762,969 2683,969 2594,1058 2594,1406 v14@2570,1430 ; C72.1@3849,5950 3849,6047 3917,6115 U44.3@4010,6115 U44.3@4010,6147 ; U60.10@4037.99,3875 4199,3875 4244,3920 4244,3942 4325,4023 4325,4275 U60.19@4412.01,4275 ; C142.1@4287,4458 4275,4470 4275,4327 4317,4285 ; C146.1@4635,3140 4710,3111 v25(4778,3082) 4871,3082 4917,3036 5234,3036 v3@5318,2952 ; C71.1@4722,5974 4722,6110 4619,6213 ; U56.15@5233.54,6250 v5(5145,6250) C129.1@5050,6345 ; U56.13@5233.54,6350 C129.1@5055,6350 ; U56.11@5233.54,6450 5127,6450 5066,6389 5066,6361 C129.1@5055,6350 ; v5(5312,4427) 5467,4427 5476,4428 6076.67,4428 U33.5@6218.67,4292 6288.67,4362 6697,4362 U36.5@6767,4292 ; U19.3@5442,1270 5492,1320 5492,1351 ; C59.1@5659,1497 C56.1@5492,1497 5492,1351 ; C62.1@5780,2012 6118,1674 U22.3@6118,1645 ; v5(5793.98,6540.98) TVS4.2@5835.02,6540.98 ; TVS5.2@5875,6380 TVS5.2@5875,6400 ; P15.4@5875,6805 TVS5.2@5875,6400 ; U20.3@5939,1273 5861,1351 5492,1351 ; U35.5@6212,5032 6278,4966 6701,4966 6757,5022 U37.5@6757,5032 ; U34.5@6225.33,3622 6290.33,3557 6712,3557 U32.5@6777,3622 ; v3(7057,5718) 7057,5893 6905,6045 6331,6045 5976,6400 TVS5.2@5875,6400 ; C159.2@7574,741.02 C159.2@7586.98,754 C159.2@7601,768.02 ; U44.3@4010,6147 4068,6205 4361,6205 U40.3@4437,6129 4437,6149 4501,6213 4619,6213 ; 4619,6213 4751,6345 C129.1@5050,6345 ; C129.1@5050,6345 C129.1@5055,6350
  Top Layer w30: C88.1@841,2190 C92.2@841,2367 ; R5.1@920,6510 R5.1@923,6510 998,6510 C7.1@1083,6510 ; R18.1@2360,6545 C20.1@2520,6545 ; C109.2@2503,1990.84 C107.2@2503,2094.88 ; v25(2580.5,4106.5) 2777.63,4106.5 U57.176@2848.91,4177.77 2857.22,4186.08
  Top Layer w35.43: v33(1686,5661) 1719.59,5627.41 U10.5@1719.59,5559
  Top Layer w40: v3@5318,2952 5383,3017 6349,3017 6555,2811 ; U45.5@6555,2745 6555,2811 ; C43.1@7574,547 C159.2@7574,741.02 ; C159.2@7601,768.02 DCDC5.1@7601,1008 7664,1008 7766,1110 7766,3059 7667,3158 7240,3158 7020,2938 6682,2938 6555,2811
  Top Layer w45: DCDC3.16@825,761 952,634 952,196 1105,36 2419,36 ; v3@988,1757 1423,1772 1539,1888 1539,1920.28 C111.2@1539,1931.26 1543,1935.26 C106.1@1543,2120.26 ; C106.1@1543,2124.26 C106.1@1543,2120.26 ; C110.2@2307,1889 2319,1997.26 C108.1@2317,2031 2480,1990 2503,1990.84 C109.2@2510.42,1991.1 ; v3(2382,2670) 2164,2426 S1.1@2170.39,2431 S1.1@1678.26,2431 1678.26,2204.52 1594,2120.26 C106.1@1543,2120.26 ; 2412,38 3746,37 7163,37 7574,448 C43.1@7574,547 ; v3(2432,3637) 2484,3688 C148.2@3795,3688
  Top Layer w50: DCDC2.5@285,2140 C90.2@595.02,2140 ; C90.2@604,2148.98 C93.1@604,2302.02 776.02,2302.02 C92.2@841,2367 ; DCDC3.16@825,761 987,923 987,1623 v3@988,1757
  Bottom Layer w10: C152.2@2978.88,3885 2982.88,3889 C151.2@2982.88,4005 2982.88,4061.88 3003,4082 3157,4082 3178,4061 v2(3178,4038)
  Bottom Layer w11.81: C6.1@664.12,6536.88 C6.1@670,6522 ; C156.1@1674,3535 C156.1@1677,3535 ; C155.1@1803,3522 C155.1@1808,3527 ; C155.1@1817,3527 1843,3553 v1(1843,3564) ; S1.1@2170.39,2431 S1.1@2170.39,2452.61 ; v21(2424,6289) D41.1@2863.29,6325 ; D37.1@2551,5604.29 2551,5546 2602,5495 v1(3026,5495) ; P9.12@2962,6039.67 P9.10@3062,6039.67 P9.8@3162,6039.67 ; v1(3190,4675) 3198,4675 C140.2@3217,4656 ; C147.1@3210,4285 C147.1@3217,4278 ; P9.4@3362,6037 P9.4@3362,6039.67 ; v39(3427,5039) 3427,5009 3460,4976 C130.2@3476,4976 v1(3502,4976) ; C144.2@3476,4214 3484,4206 3506,4206 v2(3530.01,4181.99) ; C139.2@3476,4468 3476,4458 v1(3508,4426) ; C134.2@3476,4849 v1(3510,4849) ; v1(3516,5685) v1(3550,5540)
  Bottom Layer w15: C156.1@1661,3522 C155.1@1803,3522 ; C155.1@1817,3527 1905,3439 v1(1905,3287) ; v1@1908,3138.17 1908,2715 S1.1@2170.39,2452.61 ; 3156,5002 v4(3156,5042) ; v16@3978,3095 4019,3054 4304,3054 4376,2982 v1(4376,2956)
  Bottom Layer w20: v13(1741,4721) 1741,4724 C3.2@1705,4760 1639,4694 1639,4445 1711,4373 v7(1803,4373) ; v1@3005,5002 3167,5002 3217,4952 C136.2@3217,4908 C137.2@3217,4782 C140.2@3217,4656 C143.1@3217,4530 C145.1@3217,4404 C147.1@3217,4278 ; v1(3195,4285) C147.1@3210,4285 ; C144.2@3476,4214 C141.2@3476,4341 C139.2@3476,4468 C138.2@3476,4595 C135.2@3476,4722 C134.2@3476,4849 C130.2@3476,4976
  Bottom Layer w27.56: C99.1@589,1124 589,1059 639.98,1008.02 C163.2@639.98,959 ; v7(620,6096) C6.1@672.52,6521.69 ; 639.98,776 C95.2@654.98,761 ; C6.1@670,6522 C6.1@672.56,6522 ; C6.1@672.53,6521.72 C6.1@672.56,6522 ; C6.1@673,6526 C6.1@672.56,6522 ; C18.1@2115,6447 2096,6428 2055.88,6428 C17.2@1998,6485.88 1886,6485.88 C97.1@1884,6483.88 1846.12,6446 C101.2@1758,6446 1439,6446 C12.1@1418,6467 1404,6453 1337.88,6453 C11.2@1296,6494.88 1295,6495.88 C96.1@1189,6495.88 1085.88,6495.88 C100.2@1059,6469 1054,6464 766,6464 708,6522 C6.1@672.56,6522 ; U16.5@2207,1063 2261,1063 2344,1146 2344,1297 2472,1425 v14@2571,1425 ; v21(2424,6289) C34.2@2455,6454 2557.12,6454 C31.1@2594,6490.88 v21(2646,6490.88) ; D39.1@2671,5518.07 2672,5517.07 D39.1@2672,5500 ; v49@2715,6617 2870,6683 v3(2868,6803) 3012,6841 C29.1@3018,6835 ; C41.1@3540,6457 3592,6469 3692,6529 ; C42.1@3692,6604 3692,6529 ; v16(3705,6530) 3693,6530 3692,6529 ; v25(4778,3082) 5157,3082 5182,3122 5197,3157 5187,3167 C64.1@5187,3827 5187,3907 5192,3932 5222,4337 v5(5312,4427) 5422,4537 C63.1@5422,4547 ; C78.1@4945,6230 4955,6220 5125.98,6220 C77.2@5195,6289.02 5553.02,6289.02 5628,6380 5628,6444.98 5740,6540.98 v5(5793.98,6540.98) ; U43.5@5106,1840 5447,2181 ; v5(5145,6250) C77.2@5150.49,6244.51 ; v3(5321,2950) 5321,2736 U50.5@5320,2735 5447,2608 5447,2181 ; v3(5812,1982) 5566,2137 5447,2181 ; U20.3@5939,1273 5939,1527 6057,1645 U22.3@6118,1645 ; U31.5@6122,5707 6217,5707 6322,5602 6322,5142 U35.5@6212,5032 6299,4945 6299,4482 6218.67,4401.67 U33.5@6218.67,4292 6218.67,4280.33 6307,4192 6307,3703.67 U34.5@6225.33,3622 ; U36.5@6767,4292 7057,4582 v3(7057,5718)
  Bottom Layer w30: C6.1@664.12,6536.88 C4.2@664.12,6642 ; v3(838,2264) 838,1907 v3(989,1756) ; C12.1@1418,6467 v33(1686,5661) ; v3(2432,3637) 2447,3735 2453,3979 v25(2580.5,4106.5)
  Bottom Layer w45: 639.98,776 C163.2@639.98,959 ; C95.2@654.98,761 DCDC3.16@826,761 ; S1.1@1678.26,2431 1813,2431 R137.1@1877,2367 ; v3(2382,2670) 2382,3258 2433,3309 v3(2432,3637)
  other v1: 2871.61,3684.47
  other v16: 3975,3101
  other v21: 1945,6482
GND_COM: C68.2 C69.1 C70.1 C75.1 C79.1 C164.2 C165.1 DCDC5.3 P10.1 R108.2 R116.2 R140.1 TVS1.2 TVS2.1 TVS3.1 TVS6.2 U38.5 U39.6 U39.7 U39.8 U39.9 U39.10 U39.19 U41.5 U42.5 U47.2 U48.5 U51.5 U52.5 | length 15494.6
  Top Layer w20: U52.5@2935,2421 R116.2@2991,2279 ; v10(3245,2019) 3383,2155 v10(4227,2155) ; C75.1@6180,2075 6229,2071 6240.39,2064.4 6305,2027 U47.2@6390,2025
  Top Layer w22: R116.2@2991,2279 3078,1763 U42.5@3256,1550 3256,1508 C69.1@3460,1304 3616.98,1304 C68.2@3669,1251.98 ; U41.5@3771,1540 3669,1438 C68.2@3669,1251.98 ; U39.10@3910,1361.01 3800.98,1251.98 C68.2@3669,1251.98 ; U51.5@4155,2555 4155,2395 C79.1@4145,2385 4290.93,2406.46 4349,2415 4359.29,2371 4424.29,2314 4551,2314 4631.45,2377 TVS6.2@4658,2540 ; U39.19@4310,986.99 4310,1066 4348,1104 4502,1104 C70.1@4539,1067 ; R108.2@6971,2556 7189.29,2556 TVS1.2@7190,2556.71 ; R140.1@7257,1307 R140.1@7276,1300
  Top Layer w27.56: U39.10@3910,1361.01 U39.9@3960,1361.01 U39.8@4010,1361.01 U39.7@4060,1361.01 U39.6@4110,1361.01 4110,1441 4209,1540 U38.5@4291,1540 ; C70.1@4539,1067 4548,1076 v7(4578,1076) ; v50(4969,1657) 5137,1657 5225,1569 5225,1201 ; v7(5133,1193) 5217,1193 5225,1201 ; v3(5487,499) 5487,917 5225,1179 5225,1201 ; v3(6742,1888) 6766.29,1888 TVS2.1@6824.29,1946
  Top Layer w40: C164.2@6807,1426.02 6905.02,1426.02 C165.1@7031,1552 7134,1409 7186,1353 7215,1307 R140.1@7257,1307 ; R140.1@7276,1300 DCDC5.3@7601,1208
  Bottom Layer w20: v10(3245,2019) 3159,1933 3159,1647 U42.5@3256,1550
  Bottom Layer w22: v10(4227,2155) 4283,2237 v10(4291,2406) ; v3(6742,1888) 7021,2167 v3(7021,2555)
  Bottom Layer w27.56: U38.5@4291,1540 4291,1604 4344,1657 v50@4968,1657 ; v7(4578,1076) 4696,1194 v7@5134,1194 ; U48.5@5605,2435 5605,2339 5882,2062 v3(6239,2062) ; v3@6240,2062 v3(6239,2062) ; v3(6742,1888) 6886,1744 v3(6886,1426) ; v3@6745,1884 6417,1884 v3(6239,2062)
  Bottom Layer w40: P10.1@5036,173 5328,503 6242,503 6356,579 6432,678 6564,859 6621,908 6841,1128 v3(6886,1426)
GND_DRIVE: C66.2 C67.1 CON1.1 CON1.3 CON1.4 CON1.5 CON1.7 CON1.9 CON1.11 CON1.13 CON1.15 CON1.17 CON1.19 CON1.21 CON1.23 CON1.25 CON1.27 CON1.29 CON1.31 CON1.33 CON1.34 CON1.35 CON1.36 D21.1 D22.1 D23.1 D24.1 D25.1 D26.1 D27.1 U24.5 U25.5 U26.5 U27.5 U28.5 U29.5 U30.5 U31.3 U32.3 U33.3 U34.3 U35.3 U36.3 U37.3 | length 12679.1
  Top Layer w24: 6178,4798 6591,4798 U37.3@6657,4732
  Top Layer w27.56: U29.5@5122,3622 5122,3592 5157,3557 5608.67,3557 U28.5@5673.67,3622 ; U27.5@5122,4292 5122,4282 5179,4225 5603.33,4225 U26.5@5670.33,4292 ; U25.5@5122,5032 5287,5197 U30.5@5372,5197 ; U30.5@5387,5202 5587,5202 5647,5262 D21.1@5675.07,5262 ; U24.5@5667,5032 5675.07,5040.07 D21.1@5675.07,5262 ; U31.3@6022,5407 5947,5482 5762,5482 5675.07,5395.07 D21.1@5675.07,5262 ; U33.3@6118.67,3992 6193.67,4067 6612,4067 6667,4012 U36.3@6667,3992 ; 6178,4798 U35.3@6112,4732 6112,4662 6152,4622 D25.1@6215.07,4622 ; v19(6206,5251) C66.2@6272.02,5251 ; C66.2@6252,5271.02 C66.2@6272.02,5251 ; D24.1@6258.93,3172 6258.93,3188.4 U34.3@6125.33,3322 6125.33,3330.33 6187,3392 6607,3392 U32.3@6677,3322 ; C66.2@6276.02,5252 6367.02,5372 6485,5386 6736,5381.06 6886,5309 C67.1@6900,5242.25 ; C66.2@6291.02,5232 C66.2@6272.02,5251 ; U37.3@6657,4732 6657,4712 6683.93,4685.07 D27.1@6683.93,4612 ; U32.3@6677,3327 U32.3@6677,3322 ; D22.1@6702.07,3192 6677,3217.07 U32.3@6677,3322 ; v5(6903,5259) 6903,5243 C67.1@6900,5242.25 ; CON1.36@7543,4998 7527,4982 7178,4985.61 6937,5203 6902,5222 C67.1@6900,5242.25
  Bottom Layer w27.56: U26.5@5670.33,4292 5682,4292 5750.33,4223.67 5750.33,4128.67 5807,4072 6038.67,4072 U33.3@6118.67,3992 6118.67,3778.67 6052,3712 5763.67,3712 U28.5@5673.67,3622 ; U31.3@6022,5407 6032,5397 6032,5370 6149,5253 v19@6208,5253 ; U37.3@6657,4732 6903,4978 v5(6903,5259) ; U36.3@6669.5,3989.5 6687,3972 6687,3858.93 D26.1@6698.93,3847 6799,3847 6904,3742 6904,3475 6904,3423 ; U32.3@6677,3322 6699,3382 6775,3420 6904,3423 ; CON1.1@7643,3298 7643,3384 7445,3384 7409,3420 6904,3423 ; CON1.3@7643,3398 7643,4885 7543,4885 7543,4979 7624,4979 CON1.35@7643,4998
GND_F: C57.1 C58.2 C162.2 P8.2 P8.4 P8.6 P8.8 | length 2258.6
  Top Layer w20: C162.2@6813.02,593.97 C162.2@6815.02,592
  Top Layer w40: C162.2@6813.02,593.97 C58.2@6813.02,811 6813.02,844.02 v34(6846,877)
  Top Layer w45: P8.2@6803,220 C162.2@6808,594
  Bottom Layer w45: P8.8@5623,224 5728,102 5872,102 6007,229 6120,103 6298,103 P8.4@6403,220 6435,175 6520,104 6715,104 6802,178 P8.2@6802,219 ; v34(6846,877) 6846,890 C57.1@6880,924 C57.1@6880,911
GND_P: C50.1 C52.1 C55.1 C118.2 C120.1 C160.2 C161.1 D8.1 D10.1 D13.1 DCDC4.4 P7.5 R138.1 | length 3920.4
  Top Layer w27.56: C55.1@1487,522 1492,517 v3(1569,517) 1632,517 C52.1@1641,526 ; C50.1@2068,520 C161.1@2224,520 2307.98,436.02 C160.2@2432,436.02 2432,354 v3(2440,346) ; 3045,346 3050,341
  Top Layer w45: DCDC4.4@2995,140 3045,190 3045,346 C120.1@3045,490 3050.98,495.98 C118.2@3050.98,690
  Bottom Layer w27.56: D13.1@1154.07,589 1154.07,329.93 P7.5@1299,185 1299,247 v3(1569,517) 1797,517 ; D8.1@1963.07,762 1963.07,712.07 1902,651 D10.1@1796.93,651 1796.93,517.07 1797,517 ; v3(2122,517) 1797,517 ; v3(2440,346) 2536,266 2797,266 2841,310 R138.1@2841,395 2995,241 DCDC4.4@2995,140
M\R\2\: U54.5 U54.16 | length 224.7
  Top Layer w11.81: U54.5@1726.73,1997.06 1891,1997.06 ; 1882.8,1997.06 1891,1997.06 ; U54.16@1943.27,1997.06 1891,1997.06
NetC1_1: C1.1 R3.2 U1.6 U10.3 | length 950.7
  Top Layer w22: U1.6@2309,5915 2312,5803
  Top Layer w24: U10.3@2164.47,5459 2212,5459 2251,5498 2251,5607 2275,5631 2319,5704 2333,5734 ; U1.6@2309,5915 2310,5941 2350,5975 2431,5975 R3.2@2551,5890 ; 2312,5803 2333,5734 ; 2333,5734 2381,5734 2333,5734
NetC1_2: C1.2 R4.1 U1.7 | length 396.2
  Top Layer w24: U1.7@2361,5883 2362,5851 2378,5822 2400,5805 2478,5805 2544,5751 R4.1@2544,5611
NetC5_1: C5.1 R1.1 U4.2 U10.6 | length 1239.7
  Top Layer w24: U10.6@1723.53,5459 1801,5459 ; C5.1@1874,5830 1721,5831 1722,5744 1822,5644 1822,5480 1801,5459 ; v13(1910,4964) U4.2@1915.36,4897.36 ; v36(1916.83,5203) 1861,5337 1801,5459
  Bottom Layer w24: v13(1910,4964) v36(1916.83,5203)
NetC7_2: C7.2 R2.2 U8.5 | length 2311.1
  Top Layer w11.81: C7.2@1100,6365 1162,6316 1288,6190 2715,6190 2861,6283 3020,6366 U8.5@3070,6470
  Top Layer w20: R2.2@929,6361 C7.2@1088,6361
NetC8_2: C8.2 R6.2 R8.2 U1.3 | length 1371.6
  Top Layer w24: v5(2191.46,5977) 2265,6012 2309,6049 U1.3@2309,6135
  Bottom Layer w24: R8.2@1590,5414 C8.2@1590,5272 1739,5272 R6.2@1751,5284 ; R6.2@1752,5276 1754.43,5277.23 1832,5335 1901,5469 2000,5679 2179,5934 v5(2191.46,5977)
NetC13_2: C13.2 R9.2 U8.3 | length 1440.3
  Top Layer w12: C13.2@1847,6389 1935,6227 2604,6227 2794,6520 U8.3@2859,6520
  Top Layer w20: R9.2@1683,6368 1826,6368 C13.2@1847,6389
NetC14_1: C14.1 R12.2 U2.6 U11.3 | length 930.7
  Top Layer w24: U11.3@1138.47,5470 1276,5470 C14.1@1373,5567 1373,5700 1283,5790 1283,5875 1304,5925 1408,5926 1481,5855 R12.2@1525,5830
NetC14_2: C14.2 R13.1 U2.7 | length 542.6
  Top Layer w24: U2.7@1333,5875 1333,5806 1508,5631 C14.2@1508,5567 1508,5412 R13.1@1503,5407
NetC16_1: C16.1 R11.1 U4.6 U11.6 | length 1628.1
  Top Layer w24: U11.6@694.59,5471 810,5455 1231,5034 1250,5045 C16.1@1381,4915 1597,4666 1688,4575 1817,4575 1865.36,4623.36 U4.6@1865.36,4677.36
NetC19_2: C19.2 R14.2 R17.2 U2.3 | length 1525
  Top Layer w24: v37(1032,5642) 1172,5782 1172,5932 1283,5994 1283,6043 U2.3@1283,6095
  Bottom Layer w24: R17.2@900,5234 900,5370 970,5440 ; v37(1032,5642) 952,5562 952,5545 970,5527 970,5440 ; C19.2@1252,5223 1252,5394 1208,5438 970,5440
NetC20_2: C20.2 R15.2 U53.5 | length 983.7
  Top Layer w15: C20.2@2527,6389 v12(2585,6412) ; v12(3216,6617) 3218,6619 U53.5@3274,6619
  Top Layer w20: R15.2@2365,6375 2505,6375 C20.2@2527,6389
  Bottom Layer w15: v12(2585,6412) 2695,6415 2978,6427 v12@3215,6616
NetC50_2: C50.2 D7.1 D8.2 R44.2 U15.3 | length 868.5
  Top Layer w27.56: R44.2@1927,659 2064,659 C50.2@2068,655 2094,681 v14(2094,811)
  Bottom Layer w27.56: D8.2@2096.93,762 2091.93,767 D7.1@2091.93,864 2181,864 2386,1069 U15.3@2462,1069
NetC52_2: C52.2 D9.1 D10.2 R47.2 U16.3 | length 922
  Top Layer w27.56: v14(1665,713) 1641,689 C52.2@1641,661 1787,661 R47.2@1788,662 1788,1103 1848,1163 U16.3@1907,1163
  Bottom Layer w27.56: D10.2@1663.07,651 1665.07,653 D9.1@1665.07,778
NetC55_2: C55.2 D12.1 D13.2 R53.2 U18.3 | length 638.3
  Top Layer w27.56: v14(1337,707) 1337,669 R53.2@1326,658 1486,658 C55.2@1487,657 1487,914 U18.3@1490,917
  Bottom Layer w27.56: D13.2@1295.93,586 1295.93,707 v14(1337,707)
NetC56_2: C56.2 R56.2 U57.117 | length 5376.8
  Top Layer w10: U57.117@3215.05,5095.09 3215.05,5164.05 v4(3225,5174)
  Top Layer w11.81: v8@4833,2082.5 4880,2034 5133,2034 5213,1954 5309,1793 5343,1680 R56.2@5344,1633 C56.2@5491,1633
  Bottom Layer w11.81: v4(3225,5174) 3228,5177 4249,5177 4372,5054 4372,4901 4455,4818 4455,3232 4785.5,2901.5 4785.5,2131 v8(4833,2083.5)
NetC59_2: C59.2 R59.2 U57.122 | length 5740.5
  Top Layer w10: v18(3109,5172) 3109,5152 3116.62,5144.38 U57.122@3116.62,5095.09
  Top Layer w11.81: v8(4874,2096) 4906,2066 5016,2063 5149,2065 5255.5,1970.5 5258.5,1966.5 5400,1884 5623,1705 5656,1628 C59.2@5663,1628 R59.2@5812,1628
  Bottom Layer w11.81: v18(3109,5172) 3140,5203 4278,5203 4412,5069 4412,4910 4481,4841 4481,3249 4816,2910 4814,2152 v8(4874,2096)
NetC62_2: C62.2 R64.2 U57.123 | length 5602.3
  Top Layer w10: U57.123@3096.94,5095.09 3096.94,5136.06 3082,5151 3082,5181 v18(3110.79,5209.79)
  Top Layer w11.81: v8(4884,2143) 4922,2105 5175,2105 5281,2087 5629,2028 C62.2@5645,2012 R64.2@5645,1862
  Bottom Layer w11.81: v18(3110.79,5209.79) 3127,5226 4314,5226 4446,5094 4446,4926 4508,4864 4508,3271 4854,2925 4854,2171 v8@4883,2142
NetC63_2: C63.2 R70.2 U25.3 | length 391.4
  Bottom Layer w27.56: U25.3@5022,4732 5022,4687 5117,4592 R70.2@5117,4552 5282,4552 C63.2@5287,4547
NetC64_2: C64.2 R72.2 U27.3 | length 243.6
  Top Layer w27.56: v5(5082,3842) R72.2@5112,3842
  Bottom Layer w27.56: U27.3@5022,3992 5022,3857 C64.2@5052,3827 5067,3827 v5(5082,3842)
NetC65_2: C65.2 R73.2 U29.3 | length 330.2
  Bottom Layer w27.56: R73.2@4897,3157 4925,3185 5062,3185 5062,3242 5022,3282 U29.3@5022,3322
NetC68_1: C68.1 C69.2 L2.2 P10.6 | length 1373.4
  Top Layer w27.56: C69.2@3460,1169 3490.37,1138.63 L2.2@3490.37,998 3666.98,998 C68.1@3669,1000.02 3671,996 3753,917 3938,847 P10.6@4038,160
NetC73_1: C73.1 C74.2 L3.2 P14.4 | length 660
  Bottom Layer w27.56: P14.4@7129,6830 7155,6804 C73.1@7155,6575.98 7222.98,6575.98 7267,6620 L3.2@7345.63,6620 7345.63,6519.37 7385,6480 C74.2@7385,6450
NetC76_1: C76.1 C77.1 C78.2 L4.2 P15.1 | length 1102.7
  Top Layer w27.56: v7@4978,6607 5186,6815 P15.1@5275,6815
  Bottom Layer w27.56: C78.2@4945,6365 4994.37,6414.37 4994.37,6545 4998.39,6540.98 C77.1@5195,6540.98 C76.1@5450,6540.98 ; v7(4976,6607) 4976,6551.37 L4.2@4980.37,6547
NetC116_1: C116.1 D35.1 R125.1 R126.2 R127.2 U55.1 | length 1260.8
  Top Layer w39.37: R126.2@699,3992 808,3992 v3(892,4076) 921.83,4105.83 U55.1@1079.45,4105.83
  Bottom Layer w39.37: 844.02,4045 861,4045 v3(892,4076)
  Bottom Layer w45: D35.1@752.29,4553 R125.1@788,4370 844.02,4279.02 844.02,4060 ; 844.02,4045 844.02,3969.98 931,3883 R127.2@934,3821
NetC121_1: C121.1 U56.1 | length 301.3
  Top Layer w27.56: U56.1@5426.46,6200 5443,6200 5633,6010 C121.1@5649.02,6010
NetC121_2: C121.2 U56.3 | length 607
  Top Layer w27.56: U56.3@5426.46,6300 5474,6300 5646,6128 5804,6128 5900.98,6031.02 C121.2@5900.98,6010
NetC122_2: C122.2 U56.2 | length 347.8
  Top Layer w27.56: C122.2@5425.98,6005 5425.98,6021.02 5347,6100 5347,6234 5363,6250 U56.2@5426.46,6250
NetC123_1: C123.1 U56.4 | length 704.7
  Top Layer w27.56: U56.4@5426.46,6350 5514,6350 5670,6194 v5(5950,6194)
  Bottom Layer w27.56: v5(5950,6194) 5990,6234 C123.1@5990,6294.02
NetC123_2: C123.2 U56.5 | length 763.6
  Top Layer w27.56: U56.5@5426.46,6400 v7(5503,6400)
  Bottom Layer w27.56: v7(5503,6400) v7@5505,6402 ; v7@5506,6402 5534,6402 5561,6460 5558,6565 5629,6622 5903,6622 5990,6563 C123.2@5990,6545.98
NetC124_2: C124.2 U56.6 | length 399
  Top Layer w27.56: U56.6@5426.46,6450 5537,6450 5599,6388 5599,6356 5664,6291 v10(5688,6291)
  Bottom Layer w27.56: v10(5688,6291) 5689.98,6289.02 C124.2@5740,6289.02
NetC134_1: C134.1 U57.77 Y1.1 | length 493.1
  Top Layer w10: v6(3624.31,4807.69) U57.77@3837.09,4807.69 3979.69,4807.69 Y1.1@4044,4872
  Bottom Layer w11.81: C134.1@3611,4849 3611,4821 v6(3624.31,4807.69)
NetC135_1: C135.1 U57.76 Y1.3 | length 744.5
  Top Layer w10: v9(3658,4743) 3703.01,4788.01 U57.76@3837.09,4788.01 3890.99,4788.01 3899,4780 4074,4780 4122,4828 4122,4895 Y1.3@4204,4977
  Bottom Layer w11.81: C135.1@3611,4722 3637,4722 v9(3658,4743)
NetC151_1: C151.1 U57.10 | length 122
  Top Layer w10: v2(3072,4020) 3096.94,4044.94 U57.10@3096.94,4106.91
  Bottom Layer w11.81: v2(3072,4020) C151.1@3096,4014
NetC152_1: C152.1 U57.11 | length 233
  Top Layer w10: v1(3116,3927) 3116.62,4005.62 U57.11@3116.62,4106.91
  Bottom Layer w10: C152.1@3089.12,3885 3116,3911.88 v1(3116,3927)
NetCON1_2: CON1.2 U28.6 | length 2240.7
  Bottom Layer w27.56: U28.6@5573.67,3622 5573.67,3529.33 5905,3198 6973,3198 7058,3283 7528,3283 CON1.2@7543,3298
NetCON1_10: CON1.10 U29.6 | length 2676.2
  Top Layer w27.56: U29.6@5022,3622 5022,3582 5103,3501 6880,3501 7064,3685 7530,3685 CON1.10@7543,3698
NetCON1_16: CON1.16 U27.6 | length 2700.5
  Top Layer w27.56: U27.6@5022,4292 5022,4219 5073,4168 5658,4168 5706,4120 6826,4120 6966,3980 7525,3980 CON1.16@7543,3998
NetCON1_18: CON1.18 U26.6 | length 2154.6
  Top Layer w27.56: U26.6@5570.33,4292 5570.33,4325.33 5618,4373 5714,4373 5914,4173 6895,4173 6988,4080 7525,4080 CON1.18@7543,4098